# Altium PCB IWatch_MB.PcbDoc
Units mm, origin at the board's own origin, x right, y up, seen from the top; angles counter-clockwise.
Board outline 38.13 x 36.13 mm, 2 copper layers (Top Layer, Bottom Layer); 60 components, 65 nets, 251 pads, 79 vias.
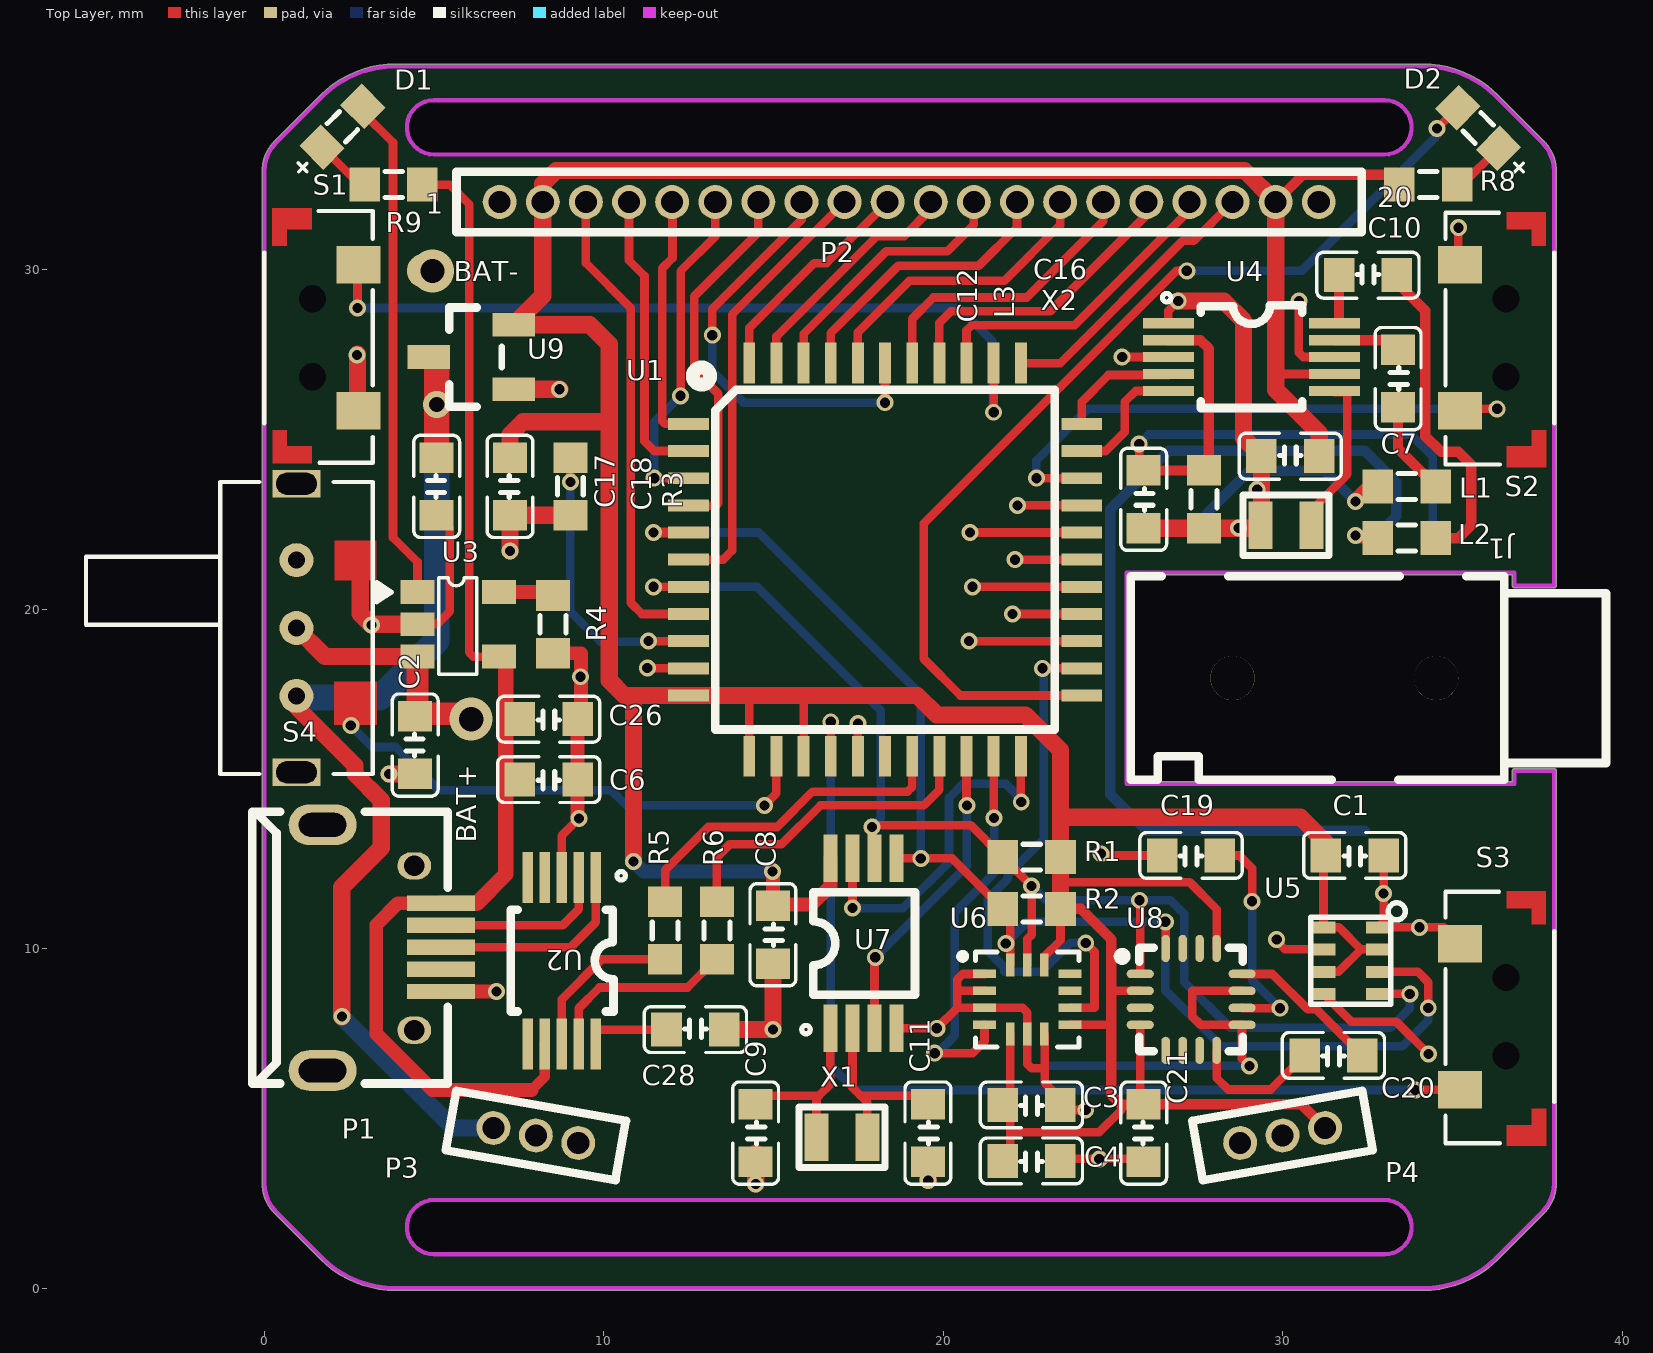
[diagram p0: Top Layer view]
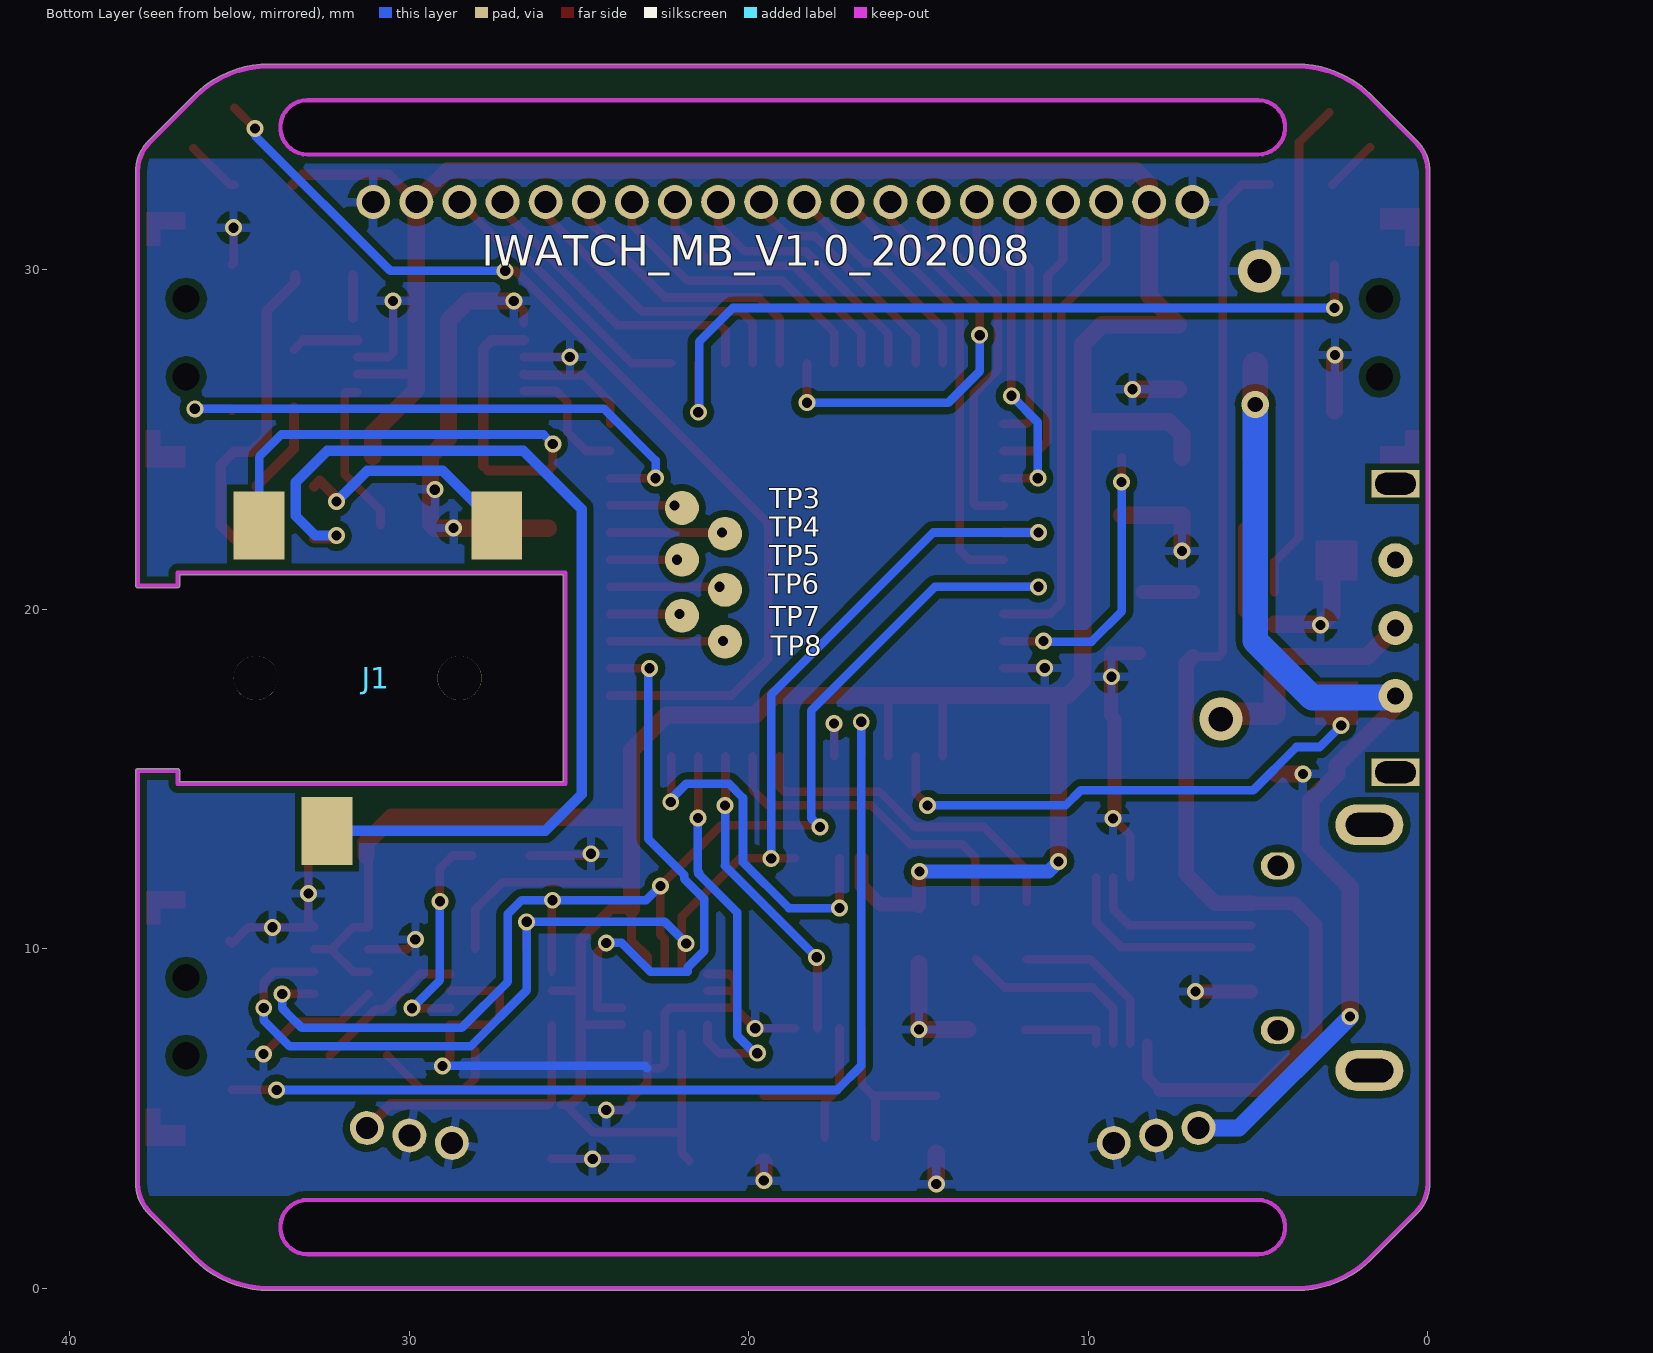
[diagram p1: Bottom Layer view, seen from below]

## Layer stack, top to bottom
Top Solder: solder mask 0.0102, Solder Resist, Dk 3.5
Top Layer: signal copper 0.0356
Dielectric 1: dielectric 0.32, FR-4, Dk 4.8
Bottom Layer: signal copper 0.0356
Bottom Solder: solder mask 0.0102, Solder Resist, Dk 3.5

## Board outline
1.657,0.853 0.309,2.201 cw(c1.209,3.101) -0.064,3.101 -0.064,32.899 cw(c1.209,32.899) 0.309,33.799 1.657,35.147 cw(c3.87,32.934) 3.87,36.064 34.13,36.064 cw(c34.13,32.934) 36.343,35.147 37.691,33.799 cw(c36.791,32.899) 38.064,32.899 38.064,20.701 cw(c38,20.701) 38,20.637 36.83,20.637 cw(c36.83,20.701) 36.766,20.701 36.766,21.018 25.464,21.018 25.464,14.923 36.766,14.923 36.766,15.24 cw(c36.83,15.24) 36.83,15.304 38,15.304 cw(c38,15.24) 38.064,15.24 38.064,3.101 cw(c36.791,3.101) 37.691,2.201 36.343,0.853 cw(c34.13,3.066) 34.13,-0.064 3.87,-0.064 cw(c3.87,3.066)
cut-out: 5,1 cw(c5,1.8) 5,2.6 33,2.6 cw(c33,1.8) 33,1
cut-out: 5,33.4 33,33.4 ccw(c33,34.2) 33,35 5,35 ccw(c5,34.2)
cut-out: 5,33.4 33,33.4 ccw(c33,34.2) 33,35 5,35 ccw(c5,34.2)

## Design rules (kind name [scope] priority, off if disabled: settings)
Clearance [All] p1: gap=0.152 ignorepadtopadclearanceinfootprint=FALSE except(0.203: Arc-Poly Track-Poly SMDPad-Poly THPad-Poly Via-Poly Fill-Poly Poly-Poly)
MinimumSolderMaskSliver [All] p1 off: minsoldermaskwidth=0.254
PolygonConnect [All] p1: connectstyle=Relief reliefconductorwidth=0.254 reliefentries=4 polygonreliefangle="90 Angle" airgapwidth=0.254
RoutingVias [All] p1: holewidth=0.711 width=1.27 viastyle="Through Hole" minholewidth=0.711 minwidth=1.27 maxholewidth=0.711 maxwidth=1.27
SilkToSilkClearance [All] p1 off: silktosilkclearance=0.254
SilkToSolderMaskClearance [IsPad] p1 off: minsilkscreentomaskgap=0.254 clearancetoexposedcopper=TRUE
SolderMaskExpansion [All] p1: expansion=0.102
Width [All] p1: maxlimit=1.27 minlimit=0.152 preferedwidth=0.254 minimp=50.000000 maximp=50.000000 favimp=50.000000
27 further rules are at their usual default settings.

## Components (designator, comment, footprint, x,y, rotation, side; value= is the part's Value field where it differs from the comment)
BAT+ "TP" TP_1mm 6.096,16.764 r90 top
BAT- "TP" TP_1mm 4.699,29.972 r90 top
C1 "0.1uF" C0603 32.125,12.75 r180 top
C2 "10uF" C0603 4.445,16.002 r90 top
C3 "0.1uF" C0603 22.6,5.4 r180 top
C4 "0.1uF" C0603 22.6,3.75 r180 top
C6 "0.1uF" C0603 8.382,14.986 r180 top
C7 "4.7uF" C0603 33.401,26.797 r270 top
C8 "0.1uF" C0603 14.986,10.414 r270 top
C9 "24pF" C0603 14.475,4.572 r270 top
C10 "4.7uF" C0603 32.512,29.845 r0 top
C11 "24pF" C0603 19.55,4.572 r270 top
C12 "24pF" C0603 25.908,23.241 r270 top
C16 "22nF" C0603 30.226,24.511 r0 top
C17 "10uF" C0603 5.08,23.622 r90 top
C18 "10uF" C0603 7.239,23.622 r90 top
C19 "4.7uF" C0603 27.3,12.75 r180 top
C20 "0.22uF" C0603 31.496,6.858 r180 top
C21 "0.1uF" C0603 25.908,4.572 r90 top
C26 "4.7uF" C0603 8.382,16.764 r180 top
C28 "0.1uF" C0603 12.7,7.62 r0 top
D1 "LED0" LED_0603 1.525,34.925 r45 top
D2 "LED0" LED_0603 35.052,33.401 r135 top
J1 "Audio PJ" "AUDIO PJ" 30.975,17.975 r270 top locked
L1 "1.8K@100MHz" R0603 33.655,23.622 r0 top
L2 "1.8K@100MHz" R0603 33.655,22.098 r0 top
L3 "100nH" R0603 27.686,23.241 r90 top
P1 "USB-B(Mini)" MICRO_USB5P_带牛角 3.048,10.033 r270 top
P2 "Header 20" HDR_1X20P_1.27MM 19,32 r0 top locked
P3 "Header 3" HDR_1X3P_1.27MM 8,4.5 r350 top locked
P4 "Header 3" HDR_1X3P_1.27MM 30,4.5 r190 top
R1 "2k" R0603 22.606,12.7 r0 top
R2 "2k" R0603 22.606,11.176 r0 top
R3 "0R" R0603 9.017,23.622 r270 top
R4 "1.25K" R0603 8.509,19.558 r90 top
R5 "220R" R0603 11.811,10.541 r270 top
R6 "22R" R0603 13.335,10.541 r270 top
R8 "10k" R0603 34.29,32.512 r180 top
R9 "10K" R0603 3.81,32.512 r0 top
S1 "SW-PB" BUTTON_3X6X3.5MM 1.422,28 r90 top
S2 "SW-PB" BUTTON_3X6X3.5MM 36.576,28 r270 top
S3 "SW-PB" BUTTON_3X6X3.5MM 36.576,8.001 r270 top
S4 "SPDT" SW-SK12D07_三脚两档 0.95,19.45 r270 top
TP3 "TP" TP_1mm 21.971,22.987 r90 bottom
TP4 "TP" TP_1mm 20.701,22.225 r90 bottom
TP5 "TP" TP_1mm 21.971,21.463 r90 bottom
TP6 "TP" TP_1mm 20.701,20.574 r90 bottom
TP7 "TP" TP_1mm 21.971,19.812 r90 bottom
TP8 "TP" TP_1mm 20.701,19.05 r90 bottom
U1 "STC8A8K64S4A12-LQFP44" LQFP44_10x10x08P 18.288,21.463 r270 top locked
U2 "CH340E" MSOP-10 8.763,9.652 r270 top
U3 "XT4054K21MR" SOT23-5 5.715,19.558 r0 top
U4 "RDA5807M" MSOP-10 29.083,27.432 r0 top
U5 "BEM280" LGA-8 32.004,9.652 r0 top
U6 "LSM6DSMTR" LGA-14L 22.479,8.509 r270 top
U7 "PCF8563T/BM8563EMA" MSOP8 17.653,10.16 r90 top
U8 "QMC5883L" LGA-16 27.305,8.509 r0 top
U9 "SC662K-3.2" SOT23-3 6.096,27.432 r0 top
X1 "32.768kHz" XTAL_2012_2P 17.018,4.445 r0 top
X2 "32.768kHz" XTAL_2012_2P 30.099,22.479 r0 top

## Footprints (in the part's own frame and the unit in brackets; to place one, negate y for a bottom-side part, rotate by r counter-clockwise, add the part's x,y. Pads: shape width x height; smd on the part's side, far side on the other; paste and mask are expansions set on the pad)
"AUDIO PJ" [mm]
  rect 2x1.5 smd far side: 1(-4.5,3.45) 2(4.5,1.45) 3(-4.5,-3.55)
  round 1.3 hole 1.3 unplated: ""(0,3.55) ""(0,-2.45)
  silkscreen extent -3,-5.45 3,8.55
BUTTON_3X6X3.5MM [mm]
  round 0 hole 0.8: 0(-1.15,0) 0(1.15,0)
  rect 1.1x1.3 smd: 1(-2.15,-1.35) 2(2.15,-1.35)
  Top Layer region: 2.718,1.185 3.81,1.185 3.81,0.025 3.2,0.025 3.2,0.762 2.718,0.762
  Top Layer region: -3.7,1.175 -2.718,1.175 -2.718,0.762 -3.2,0.762 -3.2,0.025 -3.7,0.025
  silkscreen extent -3.68,-1.78 3.73,1.42
C0603 [mm]
  rect 0.9x1 smd: 1(-0.85,0) 2(0.85,0)
  silkscreen extent -1.51,-0.67 1.51,0.67, body extent -1.03,-0.51 0.94,0.51, height 0.5
HDR_1X3P_1.27MM [mm]
  round 1 hole 0.65: 1(-1.27,0) 2(0,0) 3(1.27,0)
  silkscreen extent -2.54,-0.89 2.54,0.89
HDR_1X20P_1.27MM [mm]
  round 1 hole 0.65: 1(-12.065,0) 2(-10.795,0) 3(-9.525,0) 4(-8.255,0) 5(-6.985,0) 6(-5.715,0) 7(-4.445,0) 8(-3.175,0) 9(-1.905,0) 10(-0.635,0) 11(0.635,0) 12(1.905,0) 13(3.175,0) 14(4.445,0) 15(5.715,0) 16(6.985,0) 17(8.255,0) 18(9.525,0) 19(10.795,0) 20(12.065,0)
  silkscreen extent -13.33,-0.89 13.33,0.89
LED_0603 [mm]
  rect 0.9x1 smd: 1(-0.8,-1.05) 2(0.9,-1.05)
  silkscreen extent -1.8,-1.43 0.3,-0.67, body extent -0.75,-1.38 0.8,-0.78, height 0.4
LGA-8 [mil]
  rect 27.56x13.8 smd: 1(31.5,38.6) 2(31.5,13) 3(31.5,-13) 4(31.5,-38.6) 5(-31.5,-38.6) 6(-31.5,-13) 7(-31.5,13) 8(-31.5,38.6)
  silkscreen extent -46,-50 63,67
LGA-14L [mm]
  rect 0.25x0.675 smd: 1(-0.75,-1.263) 2(-0.25,-1.263) 3(0.25,-1.263) 4(0.75,-1.263) 8(0.75,1.263) 9(0.25,1.263) 10(-0.25,1.263) 11(-0.75,1.263)
  rect 0.675x0.25 smd: 5(1.013,-0.5) 6(1.013,0) 7(1.013,0.5) 12(-1.013,0.5) 13(-1.013,0) 14(-1.013,-0.5)
  silkscreen extent -1.4,-1.97 1.4,1.52, body extent -1.25,-1.5 1.25,1.5, height 0.9
LGA-16 [mm]
  oval 0.8x0.25 smd: 1(-1.5,0.75) 2(-1.5,0.25) 3(-1.5,-0.25) 4(-1.5,-0.75) 9(1.5,-0.75) 10(1.5,-0.25) 11(1.5,0.25) 12(1.5,0.75)
  oval 0.25x0.8 smd: 5(-0.75,-1.5) 6(-0.25,-1.5) 7(0.25,-1.5) 8(0.75,-1.5) 13(0.75,1.5) 14(0.25,1.5) 15(-0.25,1.5) 16(-0.75,1.5)
  silkscreen extent -2.16,-1.52 1.52,1.52, body extent -1.53,-1.5 1.48,1.5, height 1.01
LQFP44_10x10x08P [mil]
  rect 13.8x47.24 smd: 1(-157.48,-228) 2(-125.98,-228) 3(-94.49,-228) 4(-62.99,-228) 5(-31.5,-228) 6(0,-228) 7(31.5,-228) 8(62.99,-228) 9(94.49,-228) 10(125.98,-228) 11(157.48,-228) 23(157.48,228) 24(125.98,228) 25(94.49,228) 26(62.99,228) 27(31.5,228) 28(0,228) 29(-31.5,228) 30(-62.99,228) 31(-94.49,228) 32(-125.98,228) 33(-157.48,228)
  rect 47.24x13.8 smd: 12(228,-157.48) 13(228,-125.98) 14(228,-94.49) 15(228,-62.99) 16(228,-31.5) 17(228,0) 18(228,31.5) 19(228,62.99) 20(228,94.49) 21(228,125.98) 22(228,157.48) 34(-228,157.48) 35(-228,125.98) 36(-228,94.49) 37(-228,62.99) 38(-228,31.5) 39(-228,0) 40(-228,-31.5) 41(-228,-62.99) 42(-228,-94.49) 43(-228,-125.98) 44(-228,-157.48)
  silkscreen extent -223,-223 197,197, body extent -236,-234 236,238, height 59
MICRO_USB5P_带牛角 [mm]
  rect 0.45x2 smd: 1(-1.31,2.156) 2(-0.66,2.156) 3(-0.01,2.156) 4(0.64,2.156) 5(1.29,2.156)
  oval 0.8x1 hole 0.6: 6(-2.41,1.371) 7(2.431,1.371)
  oval 1.2x2 hole 0.7 slot 1.4 at 90 deg: 8(3.619,-1.329) 9(-3.619,-1.329)
  silkscreen extent -4,-3.4 4,2.36
MSOP8 [mil]
  rect 55x16 smd: 1(-98.5,38.39) 2(-98.5,12.8) 3(-98.5,-12.79) 4(-98.5,-38.39) 5(98.5,-38.39) 6(98.5,-12.79) 7(98.5,12.8) 8(98.5,38.39)
  silkscreen extent -105,-60 60,72
MSOP-10 [mil]
  rect 59.06x12 smd: 1(-96.5,39.37) 2(-96.5,19.68) 3(-96.5,0) 4(-96.5,-19.69) 5(-96.5,-39.37) 6(96.5,-39.37) 7(96.5,-19.69) 8(96.5,0) 9(96.5,19.68) 10(96.5,39.37)
  silkscreen extent -103,-59 59,74
R0603 [mm]
  rect 0.9x1 smd: 1(-0.85,0) 2(0.85,0)
  silkscreen extent -0.25,-0.38 0.25,0.38, body extent -1.03,-0.51 0.94,0.51, height 0.5
SOT23-3 [mm]
  rect 1.25x0.7 smd: 1(1.25,-0.95) 2(1.25,0.95) 3(-1.25,0)
  silkscreen extent -0.65,-1.46 0.9,1.46
SOT23-5 [mm]
  rect 1x0.7 smd: 1(-1.2,0.95) 2(-1.2,0) 3(-1.2,-0.95) 4(1.2,-0.95) 5(1.2,0.95)
  silkscreen extent -2.4,-1.48 0.55,1.37, body extent -1.5,-1.5 1.5,1.5, height 1.3
SW-SK12D07_三脚两档 [mm]
  round 1 hole 0.5: 1(-2,0) 2(0,0) 3(2,0)
  rect 0.8x1.4 hole 0.65 slot 1.2 at 90 deg: ""(-4.25,0) ""(4.25,0)
  silkscreen extent -4.3,-6.2 4.3,2.25
TP_1mm [mm]
  round 1 smd: 1(0,0)
XTAL_2012_2P [mm]
  rect 0.7x1.4 smd: 1(-0.75,0) 2(0.75,0)
  silkscreen extent -1.27,-0.89 1.27,0.89

## Part data
BAT+ BAT- TP3 TP4 TP5 TP6 TP7 TP8: "TEST POINT"
C1 C2 C3 C4 C6 C7 C8 C9 C10 C11 C12 C16 C17 C18 C19 C20 C21 C26 C28: library part C
D1 D2: "Typical INFRARED GaAs LED"
L1 L2: library part INDUCTOR_2, "铁心电感"
L3: library part INDUCTOR, "Inductor"
P1: library part USB5
P2: "Header, 20-Pin"
P3 P4: "Header, 3-Pin"
R1 R2 R3 R4 R5 R6 R8 R9: library part R
S1 S2 S3: "Switch"
S4: "Single-Pole Double-Throw"
U4: "SINGLE-CHIP BROADCAST FM RADIO TUNER"
U5: "Integrated Environmental Unit"
U6: "3D accelerometer and 3D gyroscope"
U7: library part PCF8563, "Real-time clock/calendar"
U8: "3-Axis Magnetic Sensor"
U9: "Low Dropout,  250mA"
X1 X2: library part XTAL_2

## Via types
v1: diameter 0.5, hole 0.3, Top Layer to Bottom Layer, tented both sides, 76 vias
v2: diameter 1.27, hole 0.711, Top Layer to Bottom Layer, 2 vias
v3: diameter 0.8, hole 0.45, Top Layer to Bottom Layer, tented both sides, 1 vias

## Nets (pads, with @x,y where several pads share a name; then routed paths per layer and width w, separated by ;. In a path a pad name is that pad's centre, name@x,y a point inside that pad or via, vN(x,y) a via of type N, cw(c..) or ccw(c..) an arc to the next point about the centre after c; other vN are vias at no path point)
3D_INT1: U1.21 U6.4 | length 11.6
  Top Layer w0.254: v1(19.75,6.925) 20.866,6.925 21.216,7.275 U6.4 ; U1.21 21.488,13.862 v1(21.5,13.85)
  Bottom Layer w0.254: v1(19.75,6.925) 19.828,6.925 20.341,7.439 20.341,11.07 21.488,12.217 21.463,12.242 21.5,12.279 v1(21.5,13.85)
3D_INT2: U1.24 U6.9 | length 16.5
  Top Layer w0.254: v1(22.925,18.263) U1.24 ; U6.9 24.459,8.259 24.459,9.916 v1(24.2,10.175)
  Bottom Layer w0.254: v1(22.925,18.263) 22.962,18.226 22.962,13.237 21.906,12.181 21.906,12.061 21.315,11.469 21.315,9.941 21.8,9.455 21.8,9.325 22.9,9.325 23.75,10.175 v1(24.2,10.175)
BLE_RX: P2.4 U1.2 | length 8.7
  Top Layer w0.254: P2.4 10.745,30.28 11.201,29.824 11.201,24.949 11.487,24.663 U1.2
BLE_SLEEP: P2.3 U1.8 | length 14.2
  Top Layer w0.254: P2.3 9.475,30.2 10.795,28.88 10.795,20.193 11.125,19.863 U1.8
BLE_TX: P2.5 U1.1 | length 7.4
  Top Layer w0.254: P2.5 12.025,31.99 12.025,30.35 11.725,30.05 11.725,25.55 11.812,25.463 U1.1
BZR: P2.18 U1.34 | length 8.2
  Top Layer w0.254: U1.34 23.454,27.254 27.061,30.861 27.386,30.861 P2.18
D0: P2.17 U1.36 | length 9.2
  Top Layer w0.254: U1.36 20.688,28.213 20.849,28.374 23.874,28.374 27.255,31.755 P2.17
D1: P2.16 U1.37 | length 9
  Top Layer w0.254: U1.37 19.888,28.438 20.231,28.781 23.156,28.781 25.985,31.61 P2.16
D2: P2.15 U1.38 | length 8.7
  Top Layer w0.254: U1.38 19.088,28.563 19.712,29.187 22.462,29.187 24.715,31.44 P2.15
D3: P2.14 U1.40 | length 8.9
  Top Layer w0.254: U1.40 17.488,28.163 19,29.675 21.8,29.675 23.445,31.32 P2.14
D4: P2.13 U1.41 | length 8.4
  Top Layer w0.254: U1.41 16.688,28.138 18.675,30.125 21.05,30.125 22.175,31.25 P2.13
D5: P2.12 U1.42 | length 7.9
  Top Layer w0.254: U1.42 15.888,28.113 18.325,30.55 20.125,30.55 20.905,31.33 P2.12
D6: P2.11 U1.43 | length 7.1
  Top Layer w0.254: U1.43 15.088,28.038 18.05,31 18.85,31 19.635,31.785 P2.11
D7: P2.10 U1.44 | length 6.6
  Top Layer w0.254: U1.44 14.288,28.288 16.2,30.2 16.565,30.2 P2.10
DIS_CS: P2.6 U1.3 | length 10
  Top Layer w0.254: v1(11.488,23.863) U1.3 ; v1@12.275,26.225 12.275,26.28 v1(12.264,26.291) 12.264,29.964 13.285,30.985 P2.6
  Bottom Layer w0.254: v1(11.488,23.863) 11.488,25.515 v1(12.264,26.291)
DIS_D/C: P2.7 U1.4 | length 10.9
  Top Layer w0.254: U1.4 12.51,23.05 13.3,23.05 13.376,23.126 13.376,26.349 12.671,27.054 12.671,29.221 14.555,31.105 P2.7
DIS_RD: P2.9 U1.6 | length 13
  Top Layer w0.254: U1.6 13.513,21.463 13.783,21.733 13.783,28.688 P2.9
DIS_WR: P2.8 U1.39 | length 12.7
  Top Layer w0.254: v1(13.2,28.075) 13.2,28.85 15.825,31.475 P2.8 ; v1(18.288,26.088) U1.39
  Bottom Layer w0.254: v1(13.2,28.075) 13.2,27.013 14.125,26.088 v1(18.288,26.088)
DN: P1.2 U2.2 | length 5.2
  Top Layer w0.254: P1.2 8.795,10.693 9.263,11.162 U2.2
DP: P1.3 U2.1 | length 6.2
  Top Layer w0.254: P1.3 9.027,10.043 9.763,10.779 U2.1
GND: BAT-.1 C1.1 C2.1 C3.1 C4.1 C6.1 C8.2 C9.2 C11.2 C12.2 C16.1 C17.1 C18.1 C19.2 C21.1 C26.1 C28.2 L3.1 P1.5 P2.1 P2.20 P3.2 P3.3 P4.2 P4.3 R3.2 R4.1 S1.1 S2.1 S3.1 U1.10 U1.16 U2.3 U3.2 U4.1 U4.3 U4.8 U5.1 U5.5 U5.7 U6.1 U6.2 U6.3 U6.6 U6.7 U7.4 U8.9 U8.11 U9.1 X2.1 | length 85
  Top Layer w0.254: U3.2 5.08,19.558 5.461,19.939 5.461,22.391 C17.1 ; U2.3 8.763,13.335 v1(9.271,13.843) ; v1@11.328,18.263 U1.10 ; U1.16 v1(17.488,16.637) ; U7.4 v1(19.812,7.658) 20.413,8.259 ; 20.417,8.759 U6.2 ; U6.1 20.574,9.259 20.413,9.098 20.413,8.259 ; U6.7 22.987,7.488 22.987,6.477 ; C3.1 23.6,5.25 v1(24.2,5.25) ; C4.1@23.456,3.81 C21.1@25.82,3.81 ; C3.1@23.456,5.588 22.987,6.057 22.987,6.477 ; v1(24.65,12.8) 24.7,12.75 C19.2 ; v1(25.273,27.432) U4.3 ; U4.1 26.632,28.791 v1(26.924,29.083) ; U8.11 27.334,8.759 27.334,8.016 27.591,7.759 U8.9 28.805,6.77 v1(29.025,6.55) ; v1@29.85,10.2 30.068,9.982 U5.7 ; v1(30.48,29.083) 30.48,27.559 30.607,27.432 U4.8 ; U5.5 32.025,7.85 33.35,7.85 v1(34.3,6.9) ; C1.1 32.975,10.803 U5.1 v1(34.036,10.632) 34.745,10.632 S3.1 S3.1@35.306,10.231 ; v1(35.179,31.242) 35.179,30.197 S2.1 ; 20.413,8.259 U6.3 22.341,8.259 22.479,8.121 U6.6 22.479,6.858 22.479,6.604 22.606,6.477 22.987,6.477
  Top Layer w0.406: P1.5 v1(6.838,8.743) ; R4.1 9.335,18.708 C26.1@9.335,16.866 ; v1@9.232,13.882 C6.1 C26.1
  Top Layer w0.508: S1.1@2.747,25.85 v1@2.747,27.512 ; 2.825,21.275 2.825,19.869 v1(3.155,19.538) ; v1@3.175,19.558 U3.2 ; v1(3.675,15.152) C2.1 ; v1(7.239,21.717) C18.1 R3.2 ; U9.1 v1(8.702,26.482) ; C28.2 v1(14.986,7.62) C8.2 ; v1(14.478,3.07) C9.2@14.478,3.976 ; C11.2 19.55,3.183 v1(19.558,3.175) ; C12.2 L3.1 29.261,22.391 X2.1 29.376,22.506 C16.1 28.85,25.037 28.85,28.5 28.267,29.083 v1(26.924,29.083)
  Bottom Layer w0.254: 22.987,6.477 23.06,6.55 v1(29.025,6.55)
  other v1: 24.6,3.81 29.825,10.275 32.975,11.625 9.315,18.014 11.283,18.268 28.7,22.4 29.25,23.525 2.727,27.492
  other v2: 4.953,29.972
I2C1_SCL: U1.33 U4.4 | length 3.6
  Top Layer w0.254: U1.33 24.079,26.111 24.871,26.903 26.632,26.903 U4.4
I2C1_SDA: U1.32 U4.5 | length 3.8
  Top Layer w0.254: U1.32 24.79,24.663 25.345,25.218 25.345,26.107 25.67,26.432 U4.5
I2C_SCL: R1.1 U1.7 U5.4 U6.13 U7.6 U8.1 | length 38.4
  Top Layer w0.152: U8.1 25.805,9.398
  Top Layer w0.254: v1(11.468,20.663) U1.7 ; v1(17.907,13.589) 17.958,13.64 20.816,13.64 R1.1 v1(22.606,11.85) 22.606,10.414 22.479,10.287 U6.13 ; v1(25.781,11.43) 25.805,11.406 25.805,9.398 ; U5.4 v1(33.746,8.672)
  Bottom Layer w0.254: v1(11.468,20.663) 14.516,20.663 18.161,17.018 18.161,13.843 v1(17.907,13.589) ; v1(22.606,11.85) 23.026,11.43 v1(25.781,11.43) 26.695,11.43 27.1,11.025 27.1,9.025 28.454,7.671 33.171,7.671 33.5,8 33.746,8.246 v1(33.746,8.672)
I2C_SDA: R2.1 U1.5 U5.3 U6.14 U7.5 U8.16 | length 40.4
  Top Layer w0.254: U7.5 v1(19.342,12.662) 20.27,12.662 R2.1 21.979,10.953 U6.14 ; U8.16 v1@26.555,10.795 ; U5.3 33.985,9.322 34.29,9.017 v1(34.29,8.255)
  Top Layer w0.305: v1(11.468,22.263) U1.5
  Bottom Layer w0.254: v1(11.468,22.263) 14.567,22.263 19.342,17.488 v1(19.342,12.662) ; v1(21.844,10.16) 22.479,10.795 v1(26.543,10.795) 26.543,8.782 28.2,7.125 33.525,7.125 34.29,7.89 v1(34.29,8.255)
KEY_DOWN: S3.2 U1.15 | length 30
  Top Layer w0.254: U1.15 v1(16.688,16.688) ; v1@33.918,5.851 S3.2
  Bottom Layer w0.254: v1(16.688,16.688) 16.688,6.553 17.399,5.842 v1(33.909,5.842)
KEY_M: S1.2 U1.35 | length 24
  Top Layer w0.254: v1(2.747,28.876) S1.2@2.747,30.15 ; v1(21.488,25.806) U1.35
  Bottom Layer w0.254: v1(2.747,28.876) 20.474,28.876 21.463,27.887 v1@21.463,25.781
KEY_OK: U1.13 | length 14.8
  Top Layer w0.254: v1(14.732,14.224) 15.088,14.58 U1.13
  Bottom Layer w0.254: v1(2.55,16.575) 3.182,15.943 3.869,15.943 5.143,14.668 10.223,14.668 10.668,14.224 v1(14.732,14.224)
KEY_UP: S2.2 U1.31 | length 17.2
  Top Layer w0.254: v1(22.746,23.863) U1.31 ; S2.2 35.284,25.908 v1(36.322,25.908)
  Bottom Layer w0.254: v1(22.746,23.863) 22.746,24.384 24.27,25.908 v1(36.322,25.908)
LOUT: J1.2 L2.1 | length 29
  Top Layer w0.305: v1(32.15,22.175) 32.227,22.098 L2.1
  Bottom Layer w0.305: v1(32.15,22.175) 32.775,22.175 33.35,22.75 33.35,23.75 32.425,24.675 26.65,24.675 24.925,22.95 24.925,14.55 26,13.475 J1.2
NetC7_1: C7.1 U4.9 | length 2
  Top Layer w0.254: C7.1@33.116,27.932 C7.1
  Top Layer w0.305: U4.9 C7.1@33.116,27.932
NetC7_2: C7.2 L1.2 | length 2.8
  Top Layer w0.305: C7.2 33.401,24.726 L1.2
NetC9_1: C9.1 U7.1 X1.1 | length 5.1
  Top Layer w0.254: C9.1@14.478,5.676 16.344,5.676 16.678,6.01 U7.1 ; X1.1 16.268,5.6
NetC10_1: C10.1 U4.10 | length 1.3
  Top Layer w0.305: 31.662,28.593 C10.1
NetC10_2: C10.2 L2.2 | length 9.8
  Top Layer w0.305: C10.2 33.362,29.638 34.206,28.794 34.206,25.103 34.671,24.638 35.179,24.638 35.56,24.257 35.56,22.479 35.179,22.098 L2.2
NetC11_1: C11.1 U7.2 X1.2 | length 5.4
  Top Layer w0.254: U7.2 17.328,5.913 17.565,5.676 ; X1.2 17.768,5.473 17.565,5.676 ; C11.1@19.558,5.676 17.565,5.676
NetC12_1: C12.1 J1.1 L3.2 U4.2 | length 18.4
  Top Layer w0.254: v1(25.775,24.875) 25.775,24.224 C12.1
  Top Layer w0.305: C12.1 L3.2 ; U4.2 27.575,27.932 27.821,27.686 L3.2@27.821,24.226
  Bottom Layer w0.254: v1(25.775,24.875) 26.05,25.15 33.775,25.15 34.425,24.5 J1.1
NetC19_1: C19.1 U8.10 | length 6.7
  Top Layer w0.254: C19.1 28.725,12.75 29.1,12.375 v1(29.1,11.4) ; U8.10 28.814,8.25 v1(29.925,8.25)
  Bottom Layer w0.254: v1(29.1,11.4) 29.1,9.075 v1(29.925,8.25)
NetC20_1: C20.1 U8.12 | length 4.5
  Top Layer w0.254: U8.12 29.696,9.259 30.738,8.217 30.987,8.217 C20.1
NetC20_2: C20.2 U8.8 | length 4
  Top Layer w0.254: U8.8 28.055,6.195 28.396,5.854 29.642,5.854 C20.2
NetC28_1: C28.1 U2.10 | length 2.5
  Top Layer w0.254: U2.10 9.763,7.62 C28.1
NetD1_1: D1.1 R9.1 | length 1.6
  Top Layer w0.254: D1.1 R9.1@2.807,32.512
NetD1_2: D1.2 U3.1 | length 14.8
  Top Layer w0.254: D1.2@2.904,34.638 3.791,33.751 3.791,22.117 4.515,21.393 U3.1
NetD2_1: D2.1 R8.1 | length 1.7
  Top Layer w0.254: R8.1 35.294,32.512 D2.1
NetD2_2: D2.2 U1.23 | length 30
  Top Layer w0.254: U1.23 20.51,17.463 19.431,18.542 19.431,22.529 26.874,29.972 v1(27.178,29.972) ; v1(34.544,34.166) D2.2
  Bottom Layer w0.254: v1(27.178,29.972) 30.566,29.972 34.544,33.95 v1(34.544,34.166)
NetR3_1: R3.1 U1.9 | length 8.2
  Top Layer w0.254: v1(9.017,23.749) R3.1 ; v1(11.316,19.063) U1.9
  Bottom Layer w0.254: v1(9.017,23.749) 9.017,19.939 9.906,19.05 v1@11.176,19.05
NetR4_2: R4.2 U3.5 | length 1.5
  Top Layer w0.406: U3.5 R4.2@8.409,20.508
NetR5_2: R5.2 U2.8 | length 4.8
  Top Layer w0.254: U2.8 8.763,8.509 9.945,9.691 R5.2
NetR6_2: R6.2 U2.9 | length 5.7
  Top Layer w0.254: U2.9 9.263,8.247 9.876,8.86 12.469,8.86 R6.2@13.3,9.691
NetTP3_1: TP3.1 U1.30 | length 1.9
  Top Layer w0.254: v1(22.187,23.063) U1.30
NetTP4_1: TP4.1 U1.29 | length 3.3
  Top Layer w0.254: v1(20.788,22.263) U1.29
NetTP5_1: TP5.1 U1.28 | length 2
  Top Layer w0.254: v1(22.112,21.463) U1.28
NetTP6_1: TP6.1 U1.27 | length 3.2
  Top Layer w0.254: v1(20.863,20.663) U1.27
NetTP7_1: TP7.1 U1.26 | length 2
  Top Layer w0.254: v1(22.038,19.863) U1.26
NetTP8_1: TP8.1 U1.25 | length 3.3
  Top Layer w0.254: v1(20.763,19.063) U1.25
NetU4_6: U4.6 X2.2 | length 4.7
  Top Layer w0.254: X2.2 30.849,22.917 31.907,23.975 31.907,26.386 31.895,26.398 U4.6@31.534,26.398
ROUT: J1.3 L1.1 | length 6.8
  Top Layer w0.305: v1(32.15,23.175) 32.15,23.299 32.639,23.788 L1.1
  Bottom Layer w0.305: J1.3 27.425,22.485 29.02,24.08 31.245,24.08 v1(32.15,23.175)
T_CLKOUT: U1.22 U7.7 | length 10.7
  Top Layer w0.254: v1(17.325,11.2) 17.328,11.203 U7.7 ; U1.22 22.288,14.337 v1(22.3,14.325)
  Bottom Layer w0.254: v1(17.325,11.2) 18.82,11.2 20.172,12.552 20.172,14.005 20.171,14.006 20.171,14.444 20.585,14.859 21.844,14.859 22.3,14.403 v1(22.3,14.325)
T_INT: U1.20 U7.3 | length 9.1
  Top Layer w0.254: U7.3 17.978,9.728 v1(18,9.75) ; U1.20 20.688,14.237 v1(20.7,14.225)
  Bottom Layer w0.254: v1@18.034,9.779 20.701,12.446 20.7,12.447 v1(20.7,14.225)
UART_RXD: R5.1 U1.18 | length 10.1
  Top Layer w0.254: R5.1 11.811,12.319 13.081,13.589 15.113,13.589 16.154,14.63 18.948,14.63 19.088,14.77 U1.18
UART_TXD: R6.1 U1.19 | length 9.7
  Top Layer w0.254: R6.1 13.335,12.7 13.716,13.081 15.24,13.081 16.383,14.224 19.431,14.224 19.888,14.681 U1.19
USB5V: C6.2 C26.2 P1.1 R9.2 U2.7 U3.4 | length 36.7
  Top Layer w0.254: R9.2 5.461,32.512 6.034,31.939 6.034,18.731 6.157,18.608 U3.4
  Top Layer w0.305: 7.874,5.842 8.263,6.231 U2.7
  Top Layer w0.406: P1.1 3.937,11.343 3.302,10.708 3.302,7.493 4.953,5.842 7.874,5.842
  Top Layer w0.457: P1.1 6.263,11.343 7.112,12.192 7.112,18.411 U3.4
VBAT: C17.2 P3.1 S4.3 U9.3 | length 31.2
  Top Layer w0.508: S4.3 0.95,17.125 2.675,15.4 2.675,15.15 3.45,14.375 3.45,12.975 2.286,11.811 v1(2.286,8.001)
  Top Layer w0.762: C17.2 U9.3@5.08,27.198
  Bottom Layer w0.508: v1(2.286,8.001) 5.566,4.721 P3.1
  Bottom Layer w0.762: S4.3@1.001,17.399 3.4,17.399 5.08,19.079 v3(5.08,26.035)
VBAT_P: BAT+.1 C2.2 S4.2 U3.3 | length 7
  Top Layer w0.508: S4.2 1.792,18.608 U3.3
  Top Layer w0.66: U3.3 4.515,16.922 BAT+.1@5.938,16.922
  other v2: 6.096,16.764
VCC3V3: C1.2 C3.2 C4.2 C8.1 C16.2 C18.2 C21.2 P2.2 P2.19 P4.1 R1.2 R2.2 R8.2 U1.11 U1.12 U1.14 U4.7 U5.2 U5.6 U5.8 U6.5 U6.8 U6.12 U7.8 U8.2 U8.4 U8.13 U9.2 | length 138.8
  Top Layer w0.254: U1.12 14.288,17.399 ; U1.14 15.888,17.463 ; C4.2 21.979,3.979 21.979,4.6 ; U6.5 21.979,4.6 ; U6.12 22.979,9.771 23.456,10.248 R2.2 ; 23.515,11.959 27.266,11.959 28.055,11.17 U8.13 ; U6.8 24.95,7.759 ; 24.95,8.759 U8.2 ; 25.25,5.406 25.25,5.25 24.6,4.6 21.979,4.6 ; 25.406,5.406 C21.2@25.525,5.406 ; C21.2@25.805,5.525 U8.4 ; 29.803,26.932 U4.7 ; U5.6 31.648,9.322 32.309,9.982 ; C1.2 31.204,12.679 U5.8 31.659,10.632 32.309,9.982 ; U5.2 32.309,9.982
  Top Layer w0.305: R2.2 24.05,11.176 24.95,10.276 24.95,8.759 24.95,7.759 24.95,5.706 25.25,5.406 25.406,5.406 ; C21.2 30.549,5.422 P4.1 ; P2.19 30.6,32.805 33.147,32.805 R8.2
  Top Layer w0.406: v1(14.975,12.275) 14.986,12.264 C8.1 15.025,11.303 16.129,11.303 16.678,11.852 U7.8
  Top Layer w0.508: C18.2 7.239,25.146 7.62,25.527 10.16,25.527 ; v1(10.875,12.575) 10.875,17.463 ; R2.2 R1.2 23.456,13.875 ; C16.2 31.076,25.185 29.795,26.466 P2.19 29.795,32.012 28.877,32.93 8.605,32.93 8.205,32.53 P2.2 8.205,29.241 U9.2 9.591,28.382 10.16,27.813 10.16,25.527 ; C1.2 31.275,13.125 30.525,13.875 23.456,13.875 ; 10.16,25.527 10.16,17.907 10.604,17.463 10.875,17.463 ; 10.875,17.463 U1.11 19.24,17.463 19.812,16.891 22.419,16.891 23.456,15.854 23.456,13.875
  Bottom Layer w0.406: v1(10.875,12.575) 11.175,12.275 v1(14.975,12.275)
pads on no net: J1. P1.4 P1.6 P1.7 P1.8 P1.9 S1.0 S2.0 S3.0 S4. S4.1 U1.17 U2.4 U2.5 U2.6 U6.10 U6.11 U8.3 U8.5 U8.6 U8.7 U8.14 U8.15

## Polygon pours and split planes (outlines as drawn)
GND on Bottom Layer "GND" (solid, remove dead copper, pour order 4): 0,33.275 37.975,33.275 38,33.25 38,2.725 0.1,2.725 0,2.825

## Keep-outs
Keep-Out Layer:
  lines w0.127: 5,36 33,36 34.13,36 cw(c34.13,32.934) 36.298,35.102 37.646,33.754 cw(c36.791,32.899) 38,32.899 38,32 38,20.701 36.83,20.701 36.83,21.082 25.4,21.082 25.4,20.193 25.4,14.859 36.83,14.859 36.83,15.24 38,15.24 38,4 38,3.101 cw(c36.791,3.101) 37.646,2.246 36.298,0.898 cw(c34.13,3.066) 34.13,0 33,0 5,0 3.87,0 cw(c3.87,3.066) 1.702,0.898 0.354,2.246 cw(c1.209,3.101) 0,3.101 0,4 0,32 0,32.899 cw(c1.209,32.899) 0.354,33.754 1.702,35.102 cw(c3.87,32.934) 3.87,36 4.885,36 5.08,36 ; 5,1 cw(c5,1.8) 5,2.6 33,2.6 cw(c33,1.8) 33,1 5,1 ; 5,33.4 cw(c5,34.2) 5,35 33,35 cw(c33,34.2) 33,33.4 5,33.4

## Other copper
Top Layer:
  rectangle net GND: 2.075,20.85 3.3,22.025
  rectangle net KEY_OK: 2.05,16.6 3.325,17.875

## Silkscreen, mask and mechanical layers (free items; w line width, h text height)
Bottom Overlay:
  text "IWATCH_MB_V1.0_202008" at 27.875,29.825 h1.52
Top Paste:
  rectangle: 2.075,16.6 3.15,17.85
  rectangle: 2.125,20.825 3.175,22.05
Top Solder:
  rectangle: 2.025,16.6 3.325,17.9
  rectangle: 2.05,20.775 3.35,22.05
Mechanical 1:
  the board outline again, w0.127

## Text inside footprints (layer, text, board x,y; h text height)
P2: Top Overlay "1" at 4.751,31.441 h1.02; Top Overlay "20" at 32.792,31.644 h1.02